# Altium PCB PWTS.PcbDoc
Units mil, origin at the board's own origin, x right, y up, seen from the top; angles counter-clockwise.
Board outline 6000 x 4000 mil, 2 copper layers (Top Layer, Bottom Layer); 55 components, 32 nets, 146 pads, 12 vias.
Unrouted connection lines stored in the file: 1.
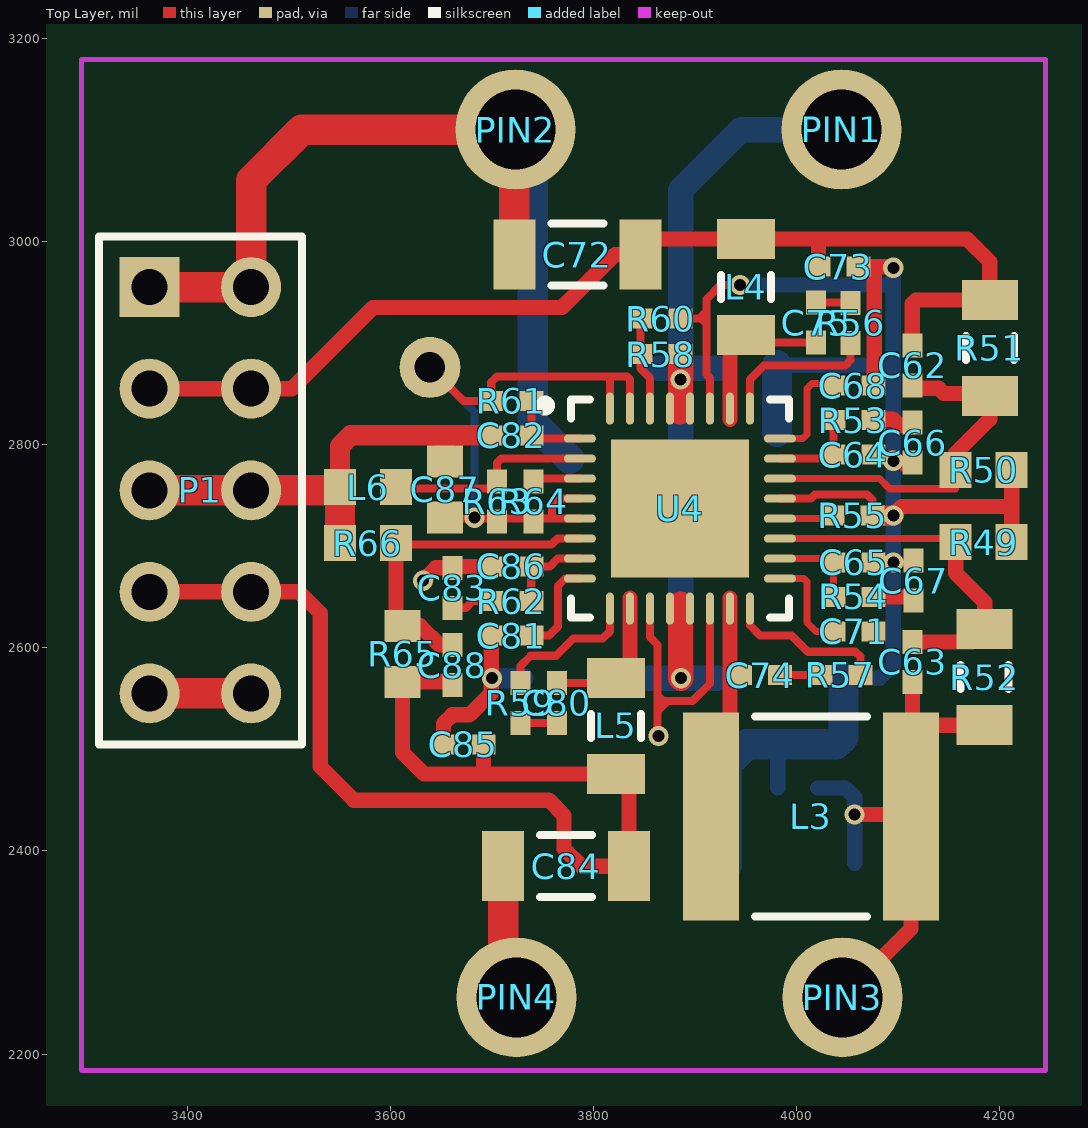
[diagram p0: Top Layer view]
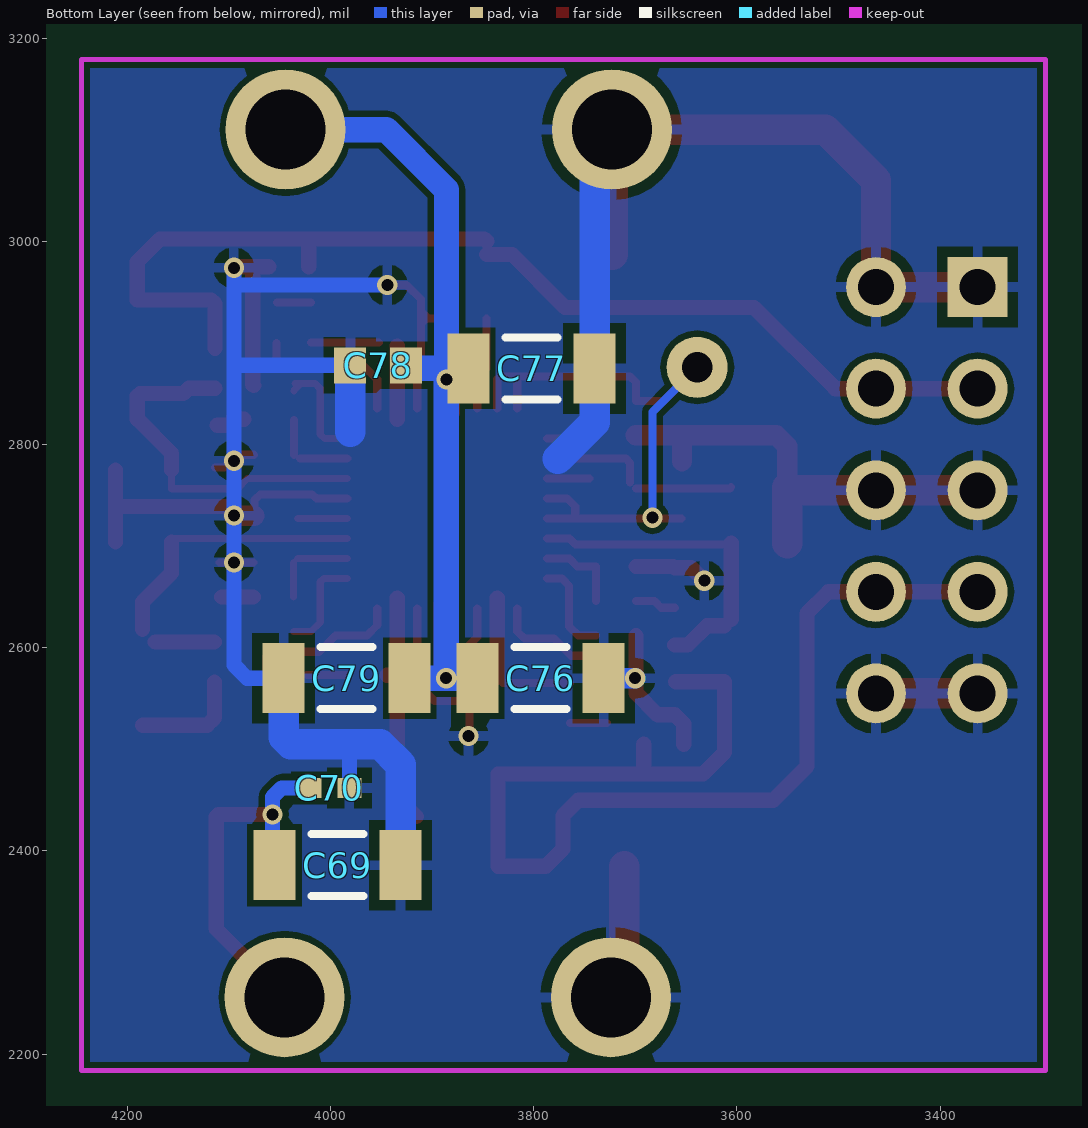
[diagram p1: Bottom Layer view, seen from below]

## Layer stack, top to bottom
Top Layer: signal copper 1.4
Dielectric: dielectric 12.6, FR-4, Dk 4.8
Bottom Layer: signal copper 1.4

## Board outline
1000,1000 7000,1000 7000,5000 1000,5000

## Design rules (kind name [scope] priority, off if disabled: settings)
Clearance [All] p1: gap=6
PolygonConnect [All] p1: connectstyle=Relief reliefconductorwidth=10 reliefentries=4 polygonreliefangle="90 Angle" airgapwidth=10
RoutingVias [All] p1: holewidth=28 width=50 viastyle="Through Hole" minholewidth=28 minwidth=50 maxholewidth=28 maxwidth=50
SolderMaskExpansion [All] p1: expansion=4
Width [All] p1: maxlimit=60 minlimit=6 preferedwidth=10 minimp=50.000000 maximp=50.000000 favimp=50.000000
28 further rules are at their usual default settings.

## Components (designator, comment, footprint, x,y, rotation, side; value= is the part's Value field where it differs from the comment)
C62 "Cap" 0402 4114,2878 r90 top
C63 "Cap" 0402 4114,2586 r90 top
C64 "Cap" 0402 4055.69,2790 r180 top
C65 "Cap" 0402 4056,2684 r0 top
C66 "Cap" 0402 4114,2802 r90 top
C67 "Cap" 0402 4115,2666 r90 top
C68 "Cap" 0402 4055.68,2858 r180 top
C69 "Cap" 1206 3993,2386 r0 bottom
C70 "Cap" 0402 4001,2462 r0 bottom
C71 "Cap" 0402 4056,2616 r0 top
C72 "Cap" 1206 3784,2987 r0 top
C73 "Cap" 0402 4041,2975 r180 top
C74 "Cap" 0402 3964,2573 r180 top
C75 "Cap" 0402 4019,2920 r90 top
C76 "Cap" 1206 3793,2570 r180 bottom
C77 "Cap" 1206 3802,2875 r180 bottom
C78 "Cap" 1608[0603] 3953,2878 r180 bottom
C79 "Cap" 1206 3984,2570 r180 bottom
C80 "Cap" 0402 3764,2545.69 r270 top
C81 "Cap" 0402 3719,2612 r0 top
C82 "Cap" 0402 3719,2809 r0 top
C83 "Cap" 0402 3661,2659 r270 top
C84 "Cap" 1206 3773,2385 r0 top
C85 "Cap" 0402 3672,2505 r0 top
C86 "Cap" 0402 3719,2680 r180 top
C87 "Cap" 1608[0603] 3654,2756 r270 top
C88 "Cap" 0402 3661,2583 r270 top
L3 "Inductor" 2220 4014,2434 r0 top
L4 "Inductor" C2012 3950,2955 r270 top
L5 "Inductor" C2012 3822,2523 r270 top
L6 "LED" 1608[0603] 3578,2758 r180 top
P1 "Header 5X2" HDR2X5 3363,2955 r270 top
PIN1 "PIN" PIN 4044,3110 r0 top
PIN2 "PIN" PIN 3723,3110 r0 top
PIN3 "PIN" PIN 4045,2256 r0 top
PIN4 "PIN" PIN 3724,2256 r0 top
R49 "精密电阻" 1608[0603] 4184,2704 r180 top
R50 "精密电阻" 1608[0603] 4184,2775 r180 top
R51 "精密电阻" R2012 4190,2895 r90 top
R52 "精密电阻" R2012 4185,2571 r90 top
R53 "Res" 0402 4055.69,2824 r180 top
R54 "Res" 0402 4056,2650 r0 top
R55 "Res" 0402 4055,2730 r0 top
R56 "Res" 0402 4053,2919.68 r90 top
R57 "Res" 0402 4043,2573 r0 top
R58 "Res" 0402 3866,2889 r0 top
R59 "Res" 0402 3728,2545.69 r90 top
R60 "Res" 0402 3866,2924 r180 top
R61 "Res" 0402 3719,2843 r0 top
R62 "Res" 0402 3719,2646 r180 top
R63 "Res" 0402 3705,2744 r270 top
R64 "Res" 0402 3741,2744 r270 top
R65 "精密电阻" 1608[0603] 3612,2594 r90 top
R66 "精密电阻" 1608[0603] 3578,2703 r0 top
U4 "TPS65261" QFN50P500X500X100_HS-33N 3885,2737 r0 top

## Footprints (in the part's own frame and the unit in brackets; to place one, negate y for a bottom-side part, rotate by r counter-clockwise, add the part's x,y. Pads: shape width x height; smd on the part's side, far side on the other; paste and mask are expansions set on the pad)
0402 [mm] "Chip Capacitor, Body 1.0x0.5mm, IPC High Density"
  rect 0.6x0.5 smd: 1(-0.5,0) 2(0.5,0)
  body extent -0.55,-0.3 0.55,0.3, height 1.3
1206 [mm]
  rect 1.05x1.75 smd: 1(-1.575,0) 2(1.575,0)
  silkscreen extent -0.65,-0.77 0.65,0.77, body extent -1.6,-0.8 1.6,0.8, height 1.6
1608[0603] [mm] "Chip Capacitor, Body 1.6x0.8mm, IPC High Density"
  rect 0.8x0.9 smd: 1(-0.7,0) 2(0.7,0)
  body extent -0.87,-0.48 0.87,0.48, height 1.3
2220 [mm] "Chip Capacitor, Body 5.7x5.0mm, IPC High Density"
  rect 1.4x5.2 smd: 1(-2.5,0) 2(2.5,0)
  silkscreen extent -1.4,-2.5 1.4,2.5, body extent -2.95,-2.63 2.95,2.63, height 1.4
C2012 [mm] "Chip Capacitor, 2-Leads, Body 2.0x1.2mm, IPC Low Density"
  rect 1x1.45 smd: 1(-1.2,0) 2(1.2,0)
  silkscreen extent -0.3,-0.63 0.3,0.63, body extent -0.98,-0.6 1.02,0.6, height 0.5
HDR2X5 [mm] "Connector; Header; 5x2 Position"
  rect 1.5x1.5 hole 0.9: 1(0,0)
  round 1.5 hole 0.9: 2(0,2.54) 3(2.54,0) 4(2.54,2.54) 5(5.08,0) 6(5.08,2.54) 7(7.62,0) 8(7.62,2.54) 9(10.16,0) 10(10.16,2.54)
  silkscreen extent -1.27,-1.27 11.43,3.81, body extent -1.27,-1.27 11.43,3.81, height 7.58
PIN [mm]
  round 3 hole 2: 1(0,0)
QFN50P500X500X100_HS-33N [mm] "QFN, 32-Leads, Body 5.00x5.00mm, Pitch 0.50mm, Thermal Pad 3.45x3.45mm, IPC Medium Density TPS65261"
  oval 0.8x0.2 smd: 1(-2.5,1.75) 2(-2.5,1.25) 3(-2.5,0.75) 4(-2.5,0.25) 5(-2.5,-0.25) 6(-2.5,-0.75) 7(-2.5,-1.25) 8(-2.5,-1.75) 17(2.5,-1.75) 18(2.5,-1.25) 19(2.5,-0.75) 20(2.5,-0.25) 21(2.5,0.25) 22(2.5,0.75) 23(2.5,1.25) 24(2.5,1.75)
  oval 0.2x0.8 smd: 9(-1.75,-2.5) 10(-1.25,-2.5) 11(-0.75,-2.5) 12(-0.25,-2.5) 13(0.25,-2.5) 14(0.75,-2.5) 15(1.25,-2.5) 16(1.75,-2.5) 25(1.75,2.5) 26(1.25,2.5) 27(0.75,2.5) 28(0.25,2.5) 29(-0.25,2.5) 30(-0.75,2.5) 31(-1.25,2.5) 32(-1.75,2.5)
  rect 3.45x3.45 smd: 33(0,0)
  silkscreen extent -3.5,-2.73 2.73,2.73, body extent -2.58,-2.57 2.57,2.58, height 1
R2012 [mm] "Chip Resistor, 2-Leads, Body 2.0x1.2mm, IPC Low Density"
  rect 1x1.4 smd: 1(-1.2,0) 2(1.2,0)
  silkscreen extent -0.3,-0.6 0.3,0.6, body extent -0.98,-0.6 1.02,0.6, height 0.5

## Part data
C62 C63 C64 C65 C66 C67 C68 C69 C70 C71 C72 C73 C74 C75 C76 C77 C78 C79 C80 C81 C82 C83 C84 C85 C86 C87 C88: "贴片电容"
P1: "Header, 5-Pin, Dual row"
R49 R50 R51 R52 R65 R66: library part Res, "贴片电阻"
R53 R54 R55 R56 R57 R58 R59 R60 R61 R62 R63 R64: "贴片电阻"

## Free pads (board coordinates)
  round 60 hole 30: 0(3639,2876)

## Via types
v1: diameter 19.8, hole 11.81, Top Layer to Bottom Layer, tented both sides, 12 vias

## Nets (pads, with @x,y where several pads share a name; then routed paths per layer and width w, separated by ;. In a path a pad name is that pad's centre, name@x,y a point inside that pad or via, vN(x,y) a via of type N, cw(c..) or ccw(c..) an arc to the next point about the centre after c; other vN are vias at no path point)
3V3: C62.2 C72.2 C73.2 L4.1 P1.3 P1.4 R51.2 | length 1075.9
  Top Layer w15: P1.3 P1.4 3503,2855 3583,2935 3769,2935 3821,2987 C72.2 ; C72.2@3846.01,3000 3848.25,3002.24 L4.1 4167.76,3002.24 4190,2980 R51.2 4117.24,2942.24 4113.68,2938.68 C62.2@4113.68,2894.69 ; C73.2 4021.31,2999.56
5V0: C84.2 C85.2 C88.2 L5.2 P1.7 P1.8 R65.1 | length 1160.7
  Top Layer w15: P1.7 P1.8 3510,2655 3531,2634 3531,2483 3564,2450 3756,2450 3771,2435 3771,2402 3788,2385 C84.2 3835.01,2475.75 L5.2 3633.24,2475.76 3612,2497 R65.1 C88.2@3660.13,2566.44 ; 3691.69,2476.07 C85.2
8V0: C63.1 C69.2 C70.2 L3.2 PIN3.1 R52.1 | length 473.7
  Top Layer w15: PIN3.1 4112.43,2323.43 L3.2 ; v1(4057,2436) L3.2@4110.43,2436 ; C63.1 4114,2531 4121.24,2523.76 R52.1
  Bottom Layer w15: C70.2 4048,2462 4057,2453 v1(4057,2436) C69.2@4057,2387.99
GND: C64.1 C65.2 C66.1 C67.2 C68.1 C69.1 C70.1 C71.2 C72.1 C73.1 C76.2 C77.2 C78.1 C79.1 C81.1 C82.1 C83.1 C84.1 C85.1 C86.2 C87.1 L6.2 P1.1 P1.2 P1.5 P1.6 P1.9 P1.10 PIN2.1 PIN4.1 R49.1 R50.1 R55.2 R60.1 R66.1 U4.11 U4.14 U4.21 U4.27 | length 3984.2
  Top Layer w8: U4.11 3855.47,2610.53 3863,2603 3863,2553 ; v1(3864,2513) 3863,2514 3863,2539 ; R60.1 3904,2924 ; U4.14 3914.53,2564.53 3897.5,2547.5 3873,2547.5 ; U4.27 3914.53,2865.47 3911,2869 3911,2919 ; v1(3944,2957) 3925,2957 3911,2943 3911,2931 ; U4.21 4013.84,2746.84 4018,2751 4069,2751 4074.69,2745.31 R55.2 4094,2730 v1@4095,2731 ; C64.1 4092,2790 4104.68,2777.32 C66.1@4113.68,2777.32 ; C65.2 v1(4095,2684) C67.2@4109.31,2684 ; 3863,2539 3863,2553 ; 3863,2539 3864.5,2539 3873,2547.5 ; 3863,2553 3868.5,2547.5 3873,2547.5 ; 3904,2924 3906,2924 3911,2919 ; 3904,2924 3911,2931 ; 3911,2919 3911,2931
  Top Layer w15: v1(3632,2666) 3644.68,2678.68 C83.1 ; C85.1 3652.32,2525.32 3661,2534 3678,2534 3699.31,2555.31 C81.1 ; C83.1@3662.32,2680 C86.2 ; C73.1 4073,2975 ; C68.1 4076.34,2858.97 4076.34,2971.66 4073,2975 ; v1@4090,2974 4089,2975 4073,2975 ; v1@4095,2731 4103,2739 4211.56,2739 ; R49.1 4211.56,2739 ; R50.1 4211.56,2739
  Top Layer w20: L6.2 3550.44,2798.44 3561,2809 C82.1 ; C87.1 3654,2804 ; R55.2 4094,2730 v1(4095,2730)
  Top Layer w30: P1.9 P1.10 ; P1.5 P1.6 L6.2@3547.44,2755 ; P1.1 P1.2 3463,3060 3513,3110 PIN2.1 ; R66.1 L6.2 ; C84.1 3710.99,2269.01 PIN4.1 ; C72.1 PIN2.1@3721.99,3108.99
  Bottom Layer w15: v1(3944,2957) 4094,2957 ; C78.1 4094,2878 ; C70.1 3981.32,2501.32 3985,2505 ; C79.1 4082,2570 4095,2583 v1(4095,2684) v1(4095,2730) v1(4095,2784) v1@4095,2969
  Bottom Layer w20: v1(3700,2570) C76.2
  Bottom Layer w30: PIN2.1@3739.99,3093.01 C77.2 3739.99,2822.01 3776,2786 ; C69.1 3930.99,2484.99 3951,2505 3985,2505 4039,2505 4046.01,2512.01 C79.1 ; 3980.56,2812.56 C78.1
  other v1: 4095,2974
NetC62_1: C62.1 R50.2 R51.1 U4.22 | length 358.2
  Top Layer w7: U4.22 4081.47,2766.53 4091.56,2756.44 4156.44,2756.44 R50.2
  Top Layer w15: C62.1@4113.68,2855.32 4139.68,2855.32 4144.68,2850.32 R51.1@4187.44,2850.32 ; R50.2 4156.44,2791.44 4190,2825 R51.1
NetC63_2: C63.2 R49.2 R52.2 U4.19 | length 330.5
  Top Layer w7: U4.19 4152.97,2707.47 R49.2
  Top Layer w15: C63.2 R52.2@4172.44,2605.69 ; R49.2 4156.44,2673.56 4185,2645 R52.2
NetC64_2: C64.2 R53.2 U4.23 | length 80.4
  Top Layer w8: U4.23 C64.2@4029.79,2786.21 ; C64.2 R53.2
NetC65_1: C65.1 R54.1 U4.18 | length 83.1
  Top Layer w7: U4.18 C65.1@4032.53,2687.79 ; R54.1 C65.1
NetC66_2: C66.2 R53.1 | length 28.9
  Top Layer w15: R53.1@4085,2825 4095,2825 4101,2819 C66.2@4111.37,2819
NetC67_1: C67.1 R54.2 | length 31.6
  Top Layer w15: R54.2 C67.1@4107.31,2650
NetC68_2: C68.2 U4.24 | length 110.2
  Top Layer w7: U4.24 4005.9,2805.9 4010,2810 4010,2855 4015,2860 C68.2@4029,2860 ; C68.2@4035,2860 C68.2@4029,2860 ; C68.2@4036,2853 4033.5,2855.5 4032,2857 C68.2@4029,2860
NetC71_1: C71.1 U4.17 | length 97.9
  Top Layer w7: U4.17 4006.9,2668.1 4010,2665 4010,2625 4019,2616 C71.1
NetC74_1: C74.1 R57.1 | length 39.6
  Top Layer w8: C74.1 R57.1
NetC74_2: C74.2 L3.1 U4.15 | length 232.8
  Top Layer w15: L3.1 3934.21,2452.64 C74.2@3934.21,2573 ; U4.15@3934.21,2649 U4.15 C74.2@3934.21,2573 ; C74.2 C74.2@3934.21,2573
NetC75_1: C75.1 L4.2 U4.26 | length 138.5
  Top Layer w8: L4.2@3952.44,2900.32 C75.1
  Top Layer w15: U4.26@3934.21,2825 U4.26 L4.2@3934.21,2896.97
NetC75_2: C75.2 R56.2 | length 33.7
  Top Layer w8: C75.2 R56.2@4052.68,2939.69
NetC80_1: C80.1 L5.1 U4.10 | length 144.1
  Top Layer w8: C80.1 L5.1@3830.13,2565.37
  Top Layer w15: L5.1@3835.79,2571.03 U4.10 U4.10@3835.79,2649
NetC80_2: C80.2 R59.1 | length 36
  Top Layer w8: R59.1 C80.2
NetC81_2: C81.2 U4.8 | length 94.6
  Top Layer w8: C81.2 3756,2612 3765,2621 3765,2661 3772.1,2668.1 U4.8
NetC82_2: C82.2 R61.2 U4.1 | length 82.6
  Top Layer w8: R61.2@3739,2842 3739.1,2841.9 3739.1,2807.58 3740.79,2805.9 U4.1
NetC83_2: C83.2 R62.2 | length 41.1
  Top Layer w8: C83.2 3674.31,2639.31 3681,2646 R62.2
NetC86_1: C86.1 R62.1 U4.7 | length 85.1
  Top Layer w8: R62.1 C86.1 3757,2680 3764.79,2687.79 U4.7
NetC88_1: C88.1 R65.2 R66.2 U4.6 | length 315.9
  Top Layer w8: R66.2 3607.06,2701.5 3758.7,2701.5 3764.67,2707.47 U4.6
  Top Layer w15: R65.2@3605.56,2628 R66.2 ; R65.2 3629.44,2621.56 3648.32,2602.68 C88.1
NetL6_1: L6.1 R63.1 U4.2 | length 196.7
  Top Layer w8: L6.1 3606.75,2756.81 R63.1@3699.13,2756.81 ; R63.1@3705,2762.68 R63.1 3705,2782 3709.16,2786.16 3786.52,2786.16 U4.2
NetR55_1: R55.1 U4.20 | length 49
  Top Layer w7: U4.20 R55.1@4032.47,2727.16
NetR56_1: R56.1 U4.25 | length 152.5
  Top Layer w8: U4.25 3953.9,2863.9 3967.84,2877.84 4047.84,2877.84 4053,2883 R56.1
NetR57_2: R57.2 U4.16 | length 156.3
  Top Layer w8: U4.16 3953.9,2622.1 3964,2612 3995,2612 4011,2596 4058,2596 4062.69,2591.31 R57.2
NetR58_1: R58.1 R60.2 U4.30 | length 92.4
  Top Layer w8: R60.2 R58.1 3846.32,2874.68 3855.47,2865.53 U4.30
NetR59_2: R59.2 U4.9 | length 145.3
  Top Layer w8: R59.2@3728,2561.37 R59.2 3728,2582 3738.16,2592.16 3763.16,2592.16 3780,2609 3809,2609 3816.1,2616.1 U4.9
NetR64_1: R64.1 U4.3 | length 41.7
  Top Layer w8: R64.1@3744.84,2766.53 U4.3
V7V: C87.2 pad.0 R61.1 R63.2 R64.2 U4.4 U4.5 U4.31 U4.32 | length 634.2
  Top Layer w8: pad.0 3672,2843 R61.1 3699.32,2861.32 3705,2867 3816.1,2867 ; C87.2@3654.28,2727.16 3758,2727.16 ; U4.5 3758,2727.16 ; U4.4 3766.84,2746.84 3759,2739 3759,2728.16 3758,2727.16 ; U4.32 3816.1,2867 ; U4.31 3835.79,2864.21 3833,2867 3816.1,2867
  Bottom Layer w8: pad.0 3683,2832 v1(3683,2728)
VCC: C76.1 C77.1 C78.2 C79.2 PIN1.1 R58.2 U4.12 U4.13 U4.28 U4.29 | length 900.3
  Top Layer w25: 3885,2832 3885,2838 3885.69,2838.69 v1(3885.69,2864) R58.2@3885.69,2881 ; v1(3886,2570) 3886,2643
  Bottom Layer w25: C76.1 v1(3886,2570) ; C77.1 3885.69,2875 ; v1@3886,2864 v1(3886,2570) ; C79.2 v1(3886,2570) ; C78.2@3922.44,2875 3885.69,2875 ; PIN1.1 3945,3110 3885.69,3050.69 3885.69,2875
pads on no net: U4.33

## Polygon pours and split planes (outlines as drawn)
GND on Bottom Layer "Top Layer-No Net" (solid, pour order 3): 3321,3179 3296,3179 3296,3156 3296,2184 3297,2185 3338,2185 3339,2184 4245,2184 4245,2217 4245,3179 4216,3179

## Keep-outs
Keep-Out Layer:
  lines w5: 3296,2184 3296,3179 4245,3179 4245,2184 3296,2184